# Altium PCB ESP32_DevBoard_B.PcbDoc
Units mm, origin at the board's own origin, x right, y up, seen from the top; angles counter-clockwise.
Board outline 118.7 x 85.5 mm, 2 copper layers (Top Layer, Bottom Layer); 33 components, 34 nets, 115 pads, 67 vias.
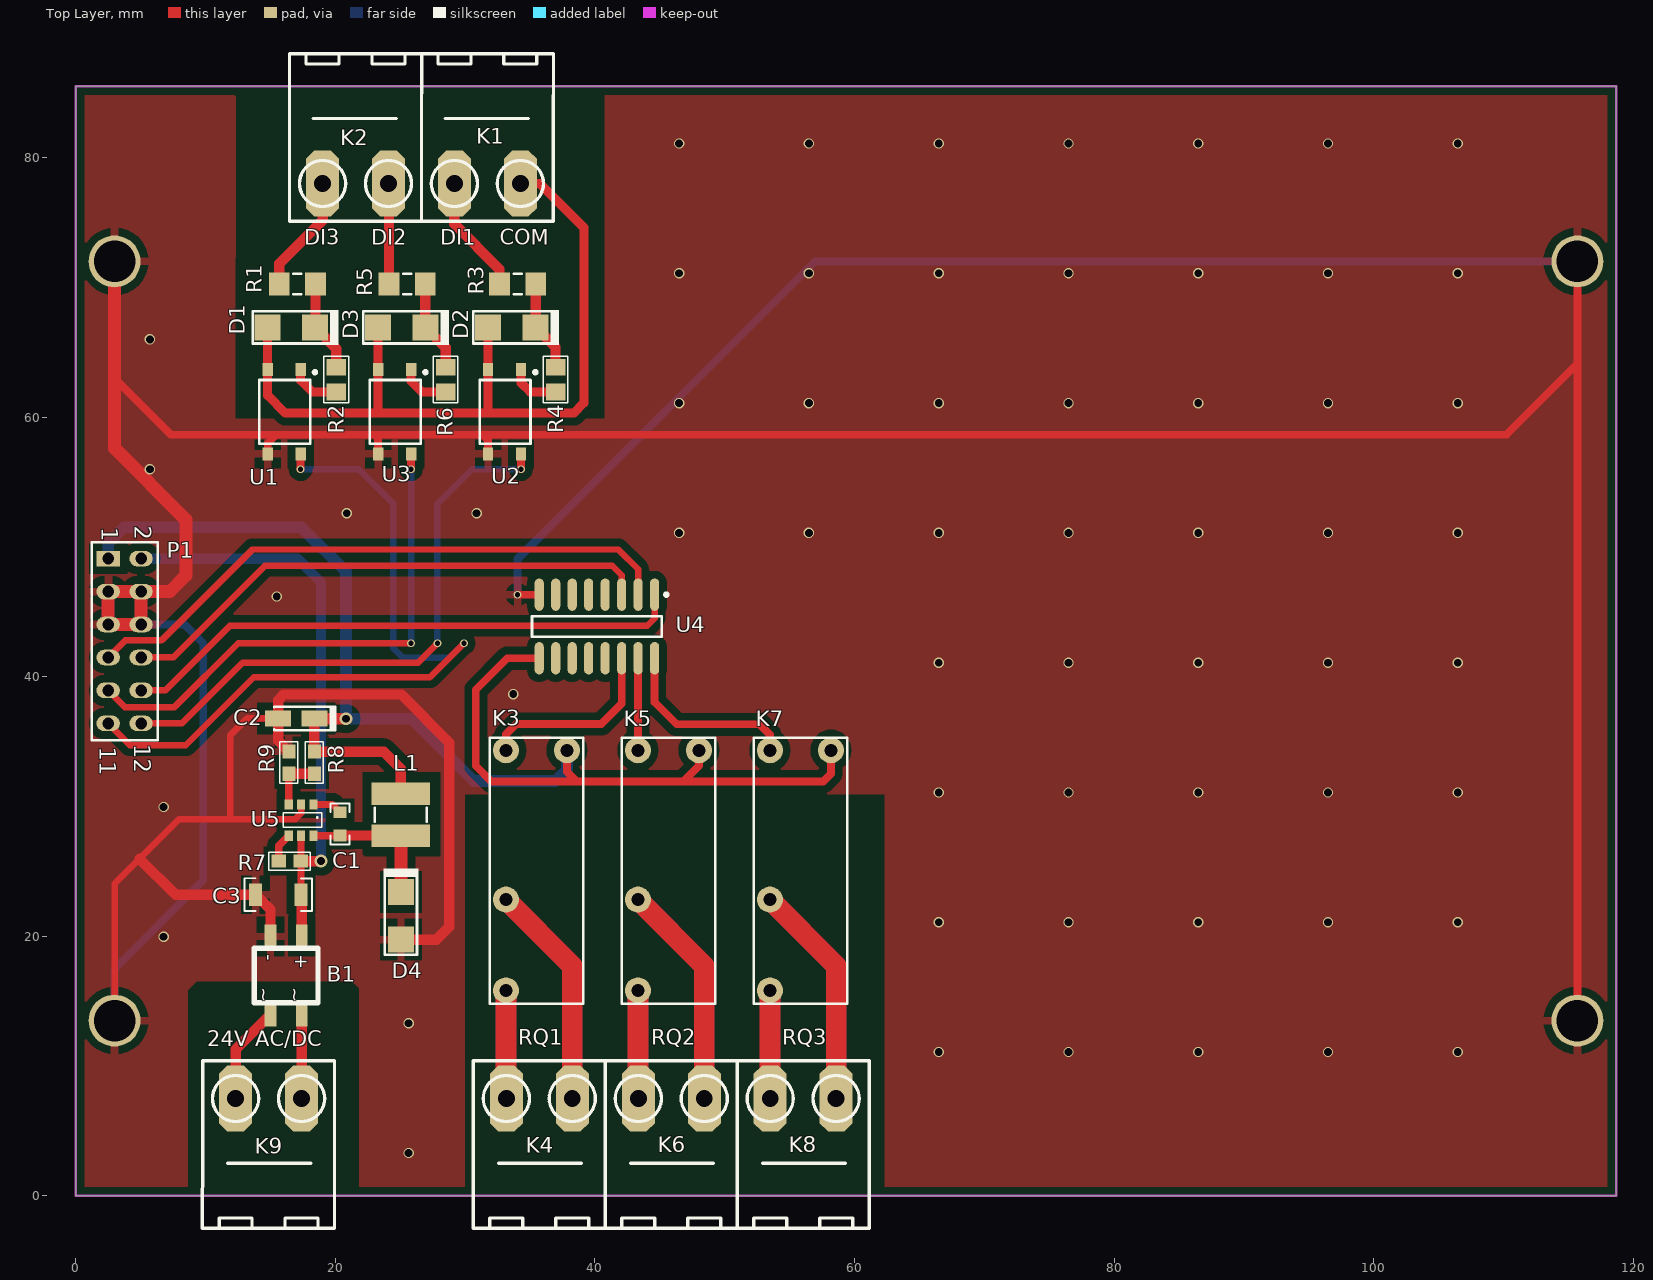
[diagram p0: Top Layer view]
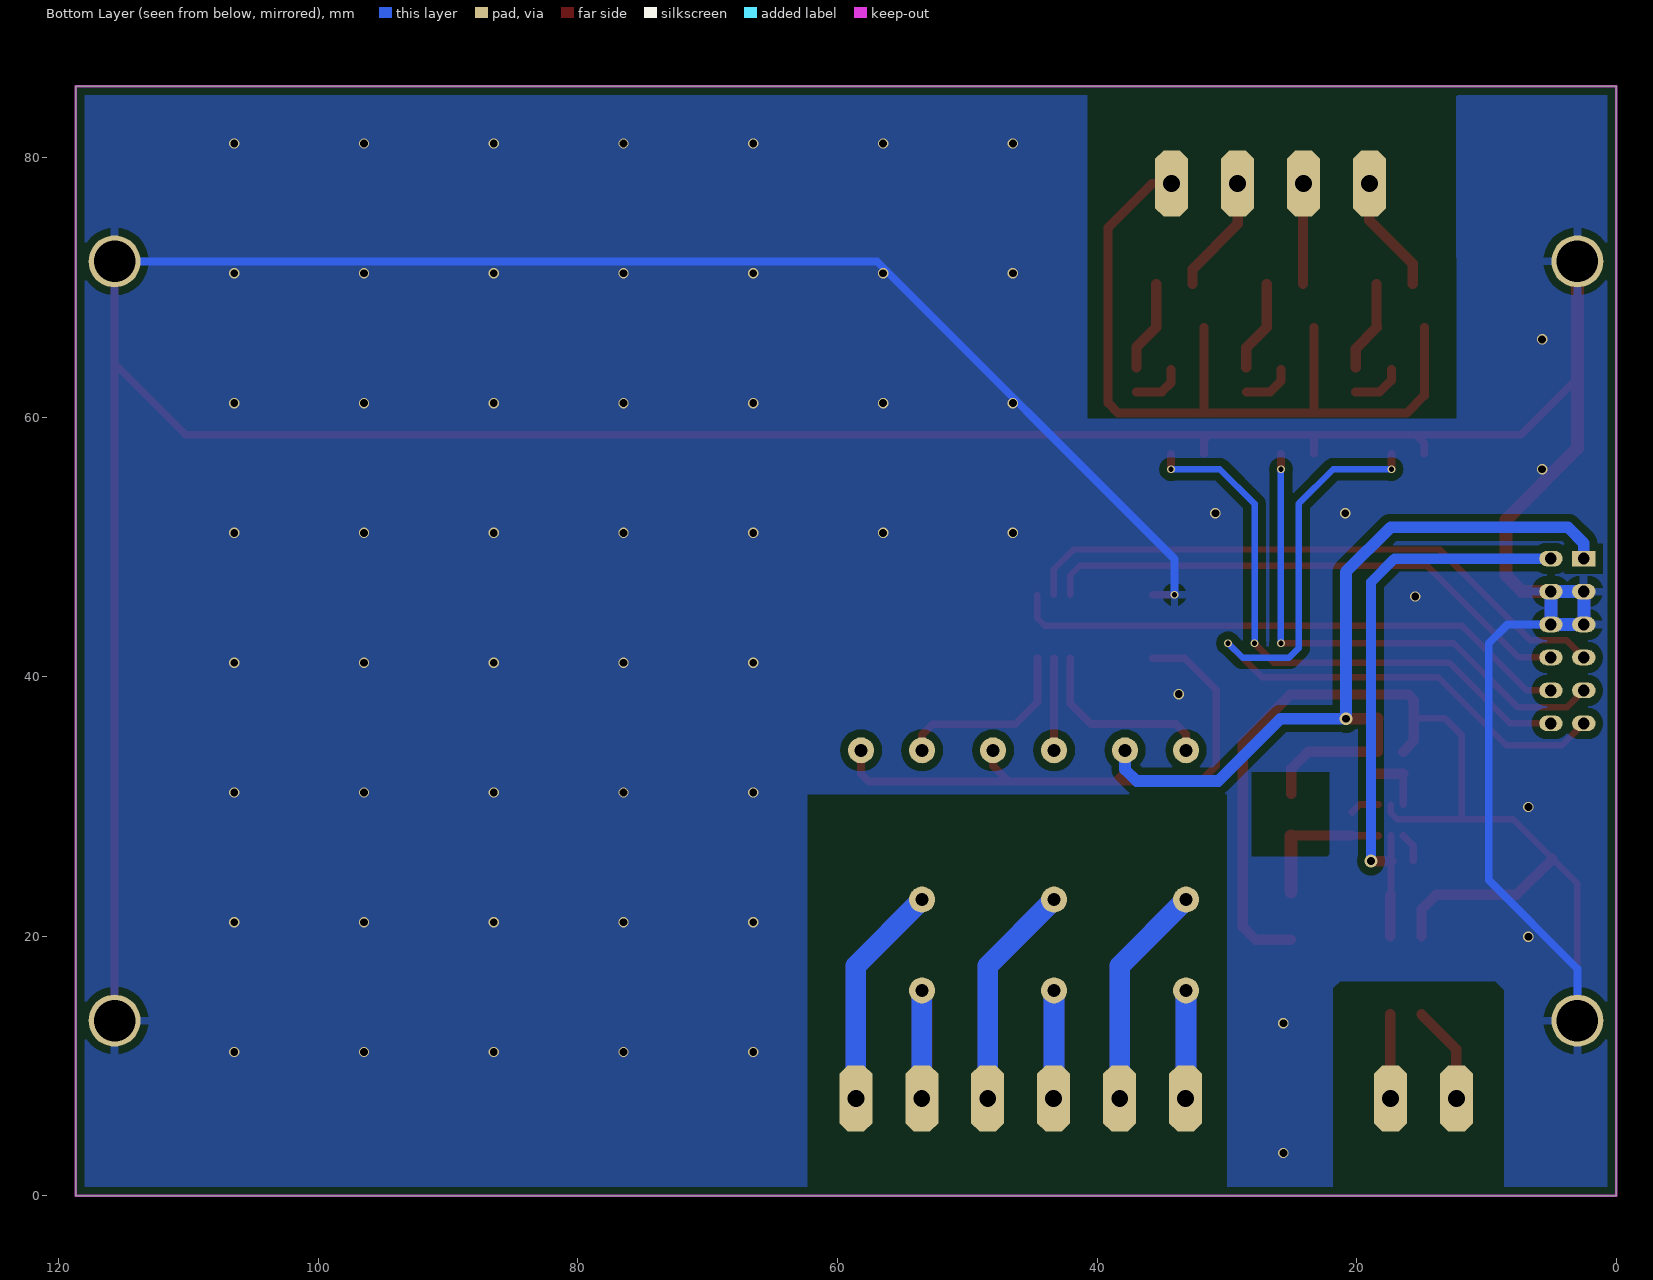
[diagram p1: Bottom Layer view, seen from below]
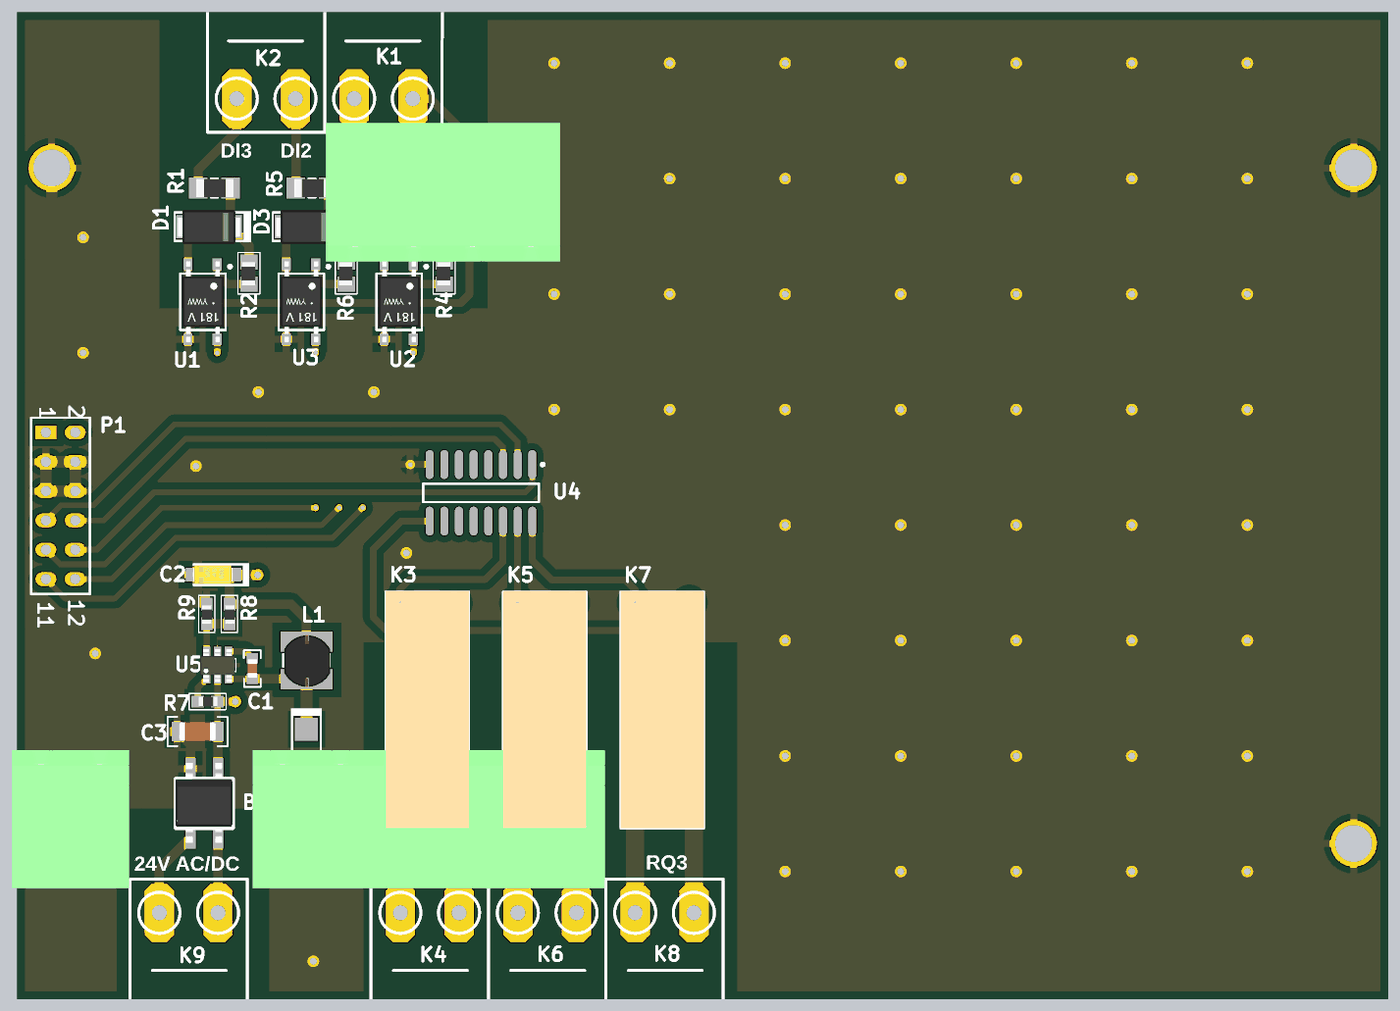
[diagram p2: 3D render of the assembled board from above, using the file's embedded part models]

## Layer stack, top to bottom
Top Layer: signal copper 0.0356
Dielectric: dielectric 0.32, FR-4, Dk 4.8
Bottom Layer: signal copper 0.0356

## Board outline
0,0 0,85.5 118.7,85.5 118.7,0

## Design rules (kind name [scope] priority, off if disabled: settings)
Clearance [All] p1: gap=0.6
PlaneConnect [All] p1: planeconnectstyle=Relief reliefexpansion=0.508 reliefentries=4 reliefconductorwidth=0.6 reliefairgap=0.254
PolygonConnect [All] p1: connectstyle=Relief reliefconductorwidth=0.6 reliefentries=4 polygonreliefangle="90 Angle"
RoutingVias [All] p1: holewidth=0.711 width=1.27 viastyle="Through Hole" minholewidth=0.711 minwidth=1.27 maxholewidth=0.711 maxwidth=1.27
SilkscreenOverComponentPads [All] p1: minsilkscreentomaskgap=0.254
SolderMaskExpansion [All] p1: expansion=0.102
TestPointUsage [All] p1: valid=0 allowmultiple=FALSE
Testpoint [All] p1: side=15 testpointundercomponent=TRUE minsize=1.016 maxsize=2.54 preferedsize=1.524 minholesize=0 maxholesize=1.016 preferedholesize=0.813 testpointgrid=0.025 style=1023 order=0123456789
Width [All] p1: maxlimit=1.6 minlimit=0.254 preferedwidth=0.6
22 further rules are at their usual default settings.

## Classes and differential pairs
component class Connector: P1
component class Input_Digital: D1 D2 D3 K1 K2 R1 R2 R3 R4 R5 R6 U1 U2 U3
component class Output_Digital: K3 K4 K5 K6 K7 K8 U4
component class Power: B1 C1 C2 C3 D4 K9 L1 R7 R8 R9 U5

## Components (designator, comment, footprint, x,y, rotation, side; value= is the part's Value field where it differs from the comment)
B1 "B10S" B10S 16.21,16.98 r90 top
C1 "100nF/35V" CAP0603W 20.37,28.66 r270 top
C2 "10uF/16V" "CAP A" 17,36.78 r180 top
C3 "4.7uF/35V" CAP1206W 15.62,23.2 r180 top
D1 "1SMA4737A" DO214AC 16.62,66.91 r0 top
D2 "1SMA4737A" DO214AC 33.6,66.91 r0 top
D3 "1SMA4737A" DO214AC 25.12,66.91 r0 top
D4 "SS16" DO214AC 25.06,21.57 r90 top
K1 "2EDGR-5.08-02P" CON_DG129_02P 31.72,78 r180 top
K2 "2EDGR-5.08-02P" CON_DG129_02P 21.56,78 r180 top
K3 "ALDP105W" RELAY_ALDP124W 35.5,25.08 r270 top
K4 "2EDGR-5.08-02P" CON_DG129_02P 35.72,7.5 r0 top
K5 "ALDP105W" RELAY_ALDP124W 45.67,25.08 r270 top
K6 "2EDGR-5.08-02P" CON_DG129_02P 45.89,7.5 r0 top
K7 "ALDP105W" RELAY_ALDP124W 55.84,25.08 r270 top
K8 "2EDGR-5.08-02P" CON_DG129_02P 56.05,7.5 r0 top
K9 "2EDGR-5.08-02P" CON_DG129_02P 14.86,7.5 r0 top
L1 "22uH" "INDUCTOR C43" 25.05,29.36 r180 top
P1 "Header 6X2" HDR2X6 2.5,49.1 r270 top locked
R1 "1K" RES3216[1206] 17.08,70.26 r180 top
R2 "1K" RES2012[0805] 20.08,62.89 r90 top
R3 "1K" RES3216[1206] 34.05,70.26 r180 top
R4 "1K" RES2012[0805] 36.97,62.89 r90 top
R5 "1K" RES3216[1206] 25.54,70.26 r180 top
R6 "1K" RES2012[0805] 28.5,62.89 r90 top
R7 "4K7" RES1608[0603] 16.49,25.79 r0 top
R8 "52K3" RES1608[0603] 18.39,33.38 r270 top
R9 "10K" RES1608[0603] 16.42,33.38 r270 top
U1 "LVT_357T" SMD-4 16.06,60.42 r180 top
U2 "LVT_357T" SMD-4 33.04,60.42 r180 top
U3 "LVT_357T" SMD-4 24.57,60.42 r180 top
U4 "ULN2004D" SO16_M 40.16,43.87 r270 top
U5 "AOZ1282CI" SOT23-6 17.36,28.95 r180 top

## Footprints (in the part's own frame and the unit in brackets; to place one, negate y for a bottom-side part, rotate by r counter-clockwise, add the part's x,y. Pads: shape width x height; smd on the part's side, far side on the other; paste and mask are expansions set on the pad)
B10S [mm] "BRIDGE RECTIFIER B10S 0.5A 1000V 1PH 7*2.3mm SMD T/R PANJIT"
  rect 1.84x0.9 smd: 1(-3,1.2) 2(-3,-1.2) 3(3,-1.2) 4(3,1.2)
  silkscreen extent -2.11,-2.45 2.09,2.45, body extent -3.4,-2.45 3.5,2.5, height 2.9
CAP0603W [mm] "capacitor 0603 wave soldering"
  rect 0.9x1 smd: 1(-0.9,0) 2(0.9,0)
  silkscreen extent -1.58,-0.73 1.59,0.72, body extent -0.8,-0.4 0.8,0.4, height 0.3
CAP1206W [mm] "capacitor 1206 wave soldering"
  rect 1x1.7 smd: 1(-1.75,0) 2(1.75,0)
  silkscreen extent -2.6,-1.27 2.6,1.27, body extent -1.6,-0.8 1.6,0.8, height 1
"CAP A" [mm] "Capacitor, SM Tantalum; Body 3.2 x 1.6 mm (LxW typ)"
  rect 2x1.2 smd: 1(-1.4,0) 2(1.4,0)
  silkscreen extent -3,-0.9 1.7,0.9, body extent -1.68,-0.8 1.78,0.8, height 1.64
CON_DG129_02P [mm] "Klemens 2'li"
  oct 2.54x5.08 hole 1.3: 1(2.54,0) 2(-2.54,0)
  silkscreen extent -5.1,-10 5.08,2.9, body extent -5.15,-9.9 5.01,2.1, height 8.6
DO214AC [mm] "DO214-AC DIODE"
  rect 2x2 smd: 1(-1.83,0) 2(1.83,0)
  silkscreen extent -2.98,-1.34 3.64,1.34, body extent -2.8,-1.5 2.8,1.45, height 2.9
HDR2X6 [mm]
  rect 1.2x1.8 hole 0.9: 1(0,0)
  oval 1.2x1.8 hole 0.9: 2(0,2.54) 3(2.54,0) 4(2.54,2.54) 5(5.08,0) 6(5.08,2.54) 7(7.62,0) 8(7.62,2.54) 9(10.16,0) 10(10.16,2.54) 11(12.7,0) 12(12.7,2.54)
  silkscreen extent -1.27,-1.27 14,3.81
"INDUCTOR C43" [mm]
  rect 4.5x1.75 smd: 1(0,1.625) 2(0,-1.625)
  silkscreen extent -2,-0.55 2,0.55, body extent -2.07,-2.19 1.93,2.31, height 3.22
RELAY_ALDP124W [mm] "RELAY PANASONIC ALDP124W"
  round 2 hole 1: 1(9.25,-2.35) 2(2.25,-2.35) 3(-9.25,2.35) 4(-9.25,-2.35)
  silkscreen extent -10.22,-3.59 10.28,3.61, body extent -10.25,-3.6 10.25,3.61, height 15.29
RES1608[0603] [mm] "Chip Capacitor; Body 1.6 x 0.8 mm (LxW typ)"
  rect 1.1x1 smd: 1(-0.85,0) 2(0.85,0)
  silkscreen extent -1.6,-0.7 1.6,0.7, body extent -0.75,-0.41 0.85,0.44, height 0.6
RES2012[0805] [mm] "Chip Resistor; Body 2.0 x 1.3 mm (LxW typ)"
  rect 1.3x1.5 smd: 1(-0.95,0) 2(0.95,0)
  silkscreen extent -1.8,-0.95 1.8,0.95, body extent -1.05,-0.55 0.95,0.65, height 0.65
RES3216[1206] [mm] "Chip Resistor; Body 3.2 x 1.6 mm (LxW typ)"
  rect 1.6x1.8 smd: 1(-1.4,0) 2(1.4,0)
  silkscreen extent -0.3,-0.8 0.3,0.8, body extent -1.65,-0.8 1.55,0.8, height 0.7
SMD-4 [mm] "NPN Phototransistor"
  rect 0.8x1 smd: 1(-1.27,-3.25) 2(1.27,-3.25) 3(1.27,3.25) 4(-1.27,3.25)
  silkscreen extent -2.5,-3.16 1.92,2.46, body extent -1.84,-3.5 1.76,3.5, height 2
SO16_M [mm] "16-Pin Small Outline Integrated Circuit 1.27 mm Pitch, IPC Low Density"
  oval 2.5x0.7 smd: 1(-2.45,4.445) 2(-2.45,3.175) 3(-2.45,1.905) 4(-2.45,0.635) 5(-2.45,-0.635) 6(-2.45,-1.905) 7(-2.45,-3.175) 8(-2.45,-4.445) 9(2.45,-4.445) 10(2.45,-3.175) 11(2.45,-1.905) 12(2.45,-0.635) 13(2.45,0.635) 14(2.45,1.905) 15(2.45,3.175) 16(2.45,4.445)
  silkscreen extent -2.57,-5 0.8,5.47, body extent -2.15,-5 1.85,5, height 1.75
SOT23-6 [mm] "IC-1282 REG BUCK ADJ 1.2A SOT23-6"
  rect 0.63x0.8 smd: 1(-0.95,-1.2) 1(-0.95,-1.2) 2(0,-1.2) 2(0,-1.2) 3(0.95,-1.2) 3(0.95,-1.2) 4(0.95,1.2) 5(0,1.2) 6(-0.95,1.2)
  silkscreen extent -1.6,-0.55 1.35,0.55, body extent -1.5,-1.37 1.5,1.47, height 1.2

## Part data
B1: library part "BRIDGE RECTIFIER", "DIODE B10S MIC SMD"
C1: library part CAP1, "CAPACITOR 0603 Case"
C2: library part CAP2, "CAPACITOR Polarized Capacitor"
C3: library part CAP1, "CAPACITOR 1206Case"
D1 D2 D3: library part DIODE, "DIODE Zener Diode 7.5V 1W DO214AC"
D4: library part DIODE, "DIODE SCHOTTKY SS16 1A 60V DO214AC SMA"
K1 K2 K4 K6 K8 K9: library part KLEMENS_2P, "CONNECTOR 5.08mm 2PIN 90DEG"
K3 K5 K7: library part RELAY_ALDP124W, "RELAY PANASONIC ALDP105W 5A"
L1: library part INDUCTOR, "INDUCTOR 22uH SDR43-220M-LF SMD 4.5X4X3.2MM"
P1: "CONNECTOR Header, 6-Pin, Dual row"
R1 R3 R5: library part RES, "RESISTOR 1206 Case %1"
R2 R4 R6: library part RES, "RESISTOR 0805 Case %1"
R7 R8 R9: library part RES, "RESISTOR 0603 Case %1"
U1 U2 U3: "OPTOCOUPLER Transistor Output Optocouplers Optocoupler Phototrans"
U4: "IC Seven Darlington Array Integrated suppression diodes for inductive  loads"
U5: "REGULATOR IC-1282 REG BUCK ADJ 1.2A SOT23-6"

## Free pads (board coordinates)
  round 4 hole 3.2: 4(3,13.5) 4(3,72) 4(115.7,13.5) 4(115.7,72)

## Via types
v1: diameter 0.8, hole 0.6, Top Layer to Bottom Layer, 58 vias
v2: diameter 0.6, hole 0.4, Top Layer to Bottom Layer, 7 vias
v3: diameter 1, hole 0.6, Top Layer to Bottom Layer, 2 vias

## Nets (pads, with @x,y where several pads share a name; then routed paths per layer and width w, separated by ;. In a path a pad name is that pad's centre, name@x,y a point inside that pad or via, vN(x,y) a via of type N, cw(c..) or ccw(c..) an arc to the next point about the centre after c; other vN are vias at no path point)
5V: C2.1 K3.3 K5.3 K7.3 L1.2 P1.1 R8.1 U4.9 | length 115
  Top Layer w0.6: U4.9 33.25,41.42 30.83,39 30.83,33.13 32.03,31.93 38.59,31.93 ; K3.3 37.85,32.67 38.59,31.93 ; K5.3 48.02,33.13 46.82,31.93 ; K7.3 58.19,32.52 57.6,31.93 46.82,31.93 ; 38.59,31.93 39.24,31.93 46.82,31.93
  Top Layer w0.8: C2.1 18.39,36.77 R8.1 23.72,34.23 25.05,32.9 L1.2
  Top Layer w0.9: C2.1 18.42,36.76 v3(20.83,36.76)
  Bottom Layer w0.9: P1.1 2.5,50.29 3.72,51.51 17.39,51.51 20.83,48.07 v3(20.83,36.76) 25.87,36.76 30.67,31.96 36.96,31.96 37.85,32.85 K3.3
24V: B1.3 C3.1 P1.2 R7.2 U5.5 | length 45.5
  Top Layer w0.55: U5.5 17.36,25.79 17.36,23.21 C3.1
  Top Layer w0.8: R7.2 17.36,25.79 v3(18.9,25.79) ; C3.1 17.41,23.16 B1.3
  Bottom Layer w0.8: P1.2 17.09,49.1 18.9,47.29 v3(18.9,25.79)
GND: B1.4 C2.2 C3.2 D4.1 P1.3 P1.4 P1.5 P1.6 pad.4 R9.1 U1.3 U2.3 U3.3 U4.8 U5.2 | length 453.7
  Top Layer w0.5: pad.4@3,13.5 3,24.06 4.915,25.975 7.95,29.01 11.89,29.01 ; C2.2 13.2,36.78 11.89,35.47 11.89,29.01 ; U5.2@17.36,30.15 17.36,29.47 16.9,29.01 11.89,29.01
  Top Layer w0.6: 3,62.98 7.34,58.64 15.45,58.64 ; U1.3 14.79,57.98 15.45,58.64 ; U3.3 23.3,58.56 23.38,58.64 ; U2.3 31.77,58.23 31.36,58.64 ; v2(34.04,46.32) U4.8 ; pad.4@115.7,13.5 115.7,64.11 ; pad.4@115.7,72 115.7,64.11 ; 15.45,58.64 23.38,58.64 ; 23.38,58.64 31.36,58.64 ; 31.36,58.64 110.23,58.64 115.7,64.11
  Top Layer w0.8: 4.915,25.975 7.69,23.2 C3.2 15.01,22.06 B1.4 ; R9.1 15.6,35.05 C2.2 15.6,38.19 16.04,38.63 25.07,38.63 28.79,34.91 28.79,20.74 27.79,19.74 D4.1
  Top Layer w1: pad.4@3,72 3,62.98 3,57.59 8.49,52.1 8.49,47.79 7.26,46.56 P1.4 ; P1.4 P1.6 P1.5 P1.3 P1.4
  Bottom Layer w0.6: pad.4@3,13.5 3,17.5 9.83,24.33 9.83,42.57 8.38,44.02 P1.6 ; v2(34.04,46.32) 34.04,49.07 56.97,72 pad.4@115.7,72
  Bottom Layer w1: P1.5 P1.6 P1.4 P1.3 P1.5
  other v1: 5.72,55.99 46.49,61.08 56.49,71.08
GND_ISO: D1.1 D2.1 D3.1 K1.2 U1.2 U2.2 U3.2 | length 63.6
  Top Layer w0.7: D1.1 U1.2 14.79,61.67 16.15,60.31 23.18,60.31 ; D3.1 23.3,66.9 U3.2 23.3,60.43 23.18,60.31 ; D2.1 U2.2 31.77,60.47 31.61,60.31 ; K1.2 35.77,78 39.16,74.61 39.16,61.09 38.38,60.31 31.61,60.31 ; 23.18,60.31 31.61,60.31
NetB1_1: B1.1 K9.2 | length 7.6
  Top Layer w0.8: K9.2 12.32,11.29 B1.1
NetB1_2: B1.2 K9.1 | length 6.5
  Top Layer w0.8: K9.1 17.41,7.51 B1.2
NetC1_1: C1.1 U5.1 | length 2.3
  Top Layer w0.55: U5.1@18.31,30.15 19.78,30.15 C1.1
NetC1_2: C1.2 D4.2 L1.1 U5.6 | length 11.1
  Top Layer w0.55: U5.6 20.36,27.75 C1.2
  Top Layer w0.8: C1.2 25.025,27.76 L1.1
  Top Layer w1: L1.1 25.06,27.725 D4.2
NetD1_2: D1.2 R1.1 R2.2 | length 7.1
  Top Layer w0.8: R1.1 18.48,66.94 D1.2 20.08,65.28 R2.2
NetD2_2: D2.2 R3.1 R4.2 | length 7.1
  Top Layer w0.8: R3.1 35.45,66.93 D2.2 36.97,65.37 R4.2
NetD3_2: D3.2 R5.1 R6.2 | length 7.1
  Top Layer w0.8: R5.1 26.94,66.92 D3.2 28.5,65.36 R6.2
NetK1_1: K1.1 R3.2 | length 9.2
  Top Layer w0.8: K1.1 29.18,74.88 32.65,71.41 R3.2
NetK2_1: K2.1 R1.2 | length 9.1
  Top Layer w0.8: R1.2 15.68,71.83 19.02,75.17 K2.1
NetK2_2: K2.2 R5.2 | length 7.8
  Top Layer w0.8: K2.2 24.14,77.96 R5.2
NetK3_1: K3.1 K4.2 | length 16.7
  Top Layer w1.6: K3.1 33.15,7.53 K4.2
  Bottom Layer w1.6: K3.1 33.15,7.53 K4.2
NetK3_2: K3.2 K4.1 | length 34.9
  Top Layer w1.6: K3.2 38.26,17.72 K4.1
  Bottom Layer w1.6: K3.2 38.26,17.72 K4.1
NetK3_4: K3.4 U4.14 | length 14.6
  Top Layer w0.6: K3.4 33.15,35.56 33.95,36.36 40.495,36.36 42.065,37.93 U4.14
NetK5_1: K5.1 K6.2 | length 16.7
  Top Layer w1.6: K5.1 43.32,7.53 K6.2
  Bottom Layer w1.6: K5.1 43.32,7.53 K6.2
NetK5_2: K5.2 K6.1 | length 34.9
  Top Layer w1.6: K5.2 48.43,17.72 K6.1
  Bottom Layer w1.6: K5.2 48.43,17.72 K6.1
NetK5_4: K5.4 U4.15 | length 7.1
  Top Layer w0.6: K5.4 43.335,34.345 U4.15
NetK7_1: K7.1 K8.2 | length 16.7
  Top Layer w1.6: K7.1 53.49,7.52 K8.2
  Bottom Layer w1.6: K7.1 53.51,15.81 K8.2
NetK7_2: K7.2 K8.1 | length 34.9
  Top Layer w1.6: K7.2 58.59,17.73 K8.1
  Bottom Layer w1.6: K7.2 58.59,17.73 K8.1
NetK7_4: K7.4 U4.16 | length 14.5
  Top Layer w0.6: U4.16 44.605,38.035 46.31,36.33 52.68,36.33 53.49,35.52 K7.4
NetP1_7: P1.7 U4.2 | length 46.9
  Top Layer w0.5: P1.7 3.81,42.79 6.61,42.79 13.62,49.8 41.81,49.8 43.335,48.275 U4.2
NetP1_8: P1.8 U4.3 | length 41.7
  Top Layer w0.5: P1.8 7.52,41.48 14.58,48.54 41.34,48.54 42.065,47.815 U4.3
NetP1_9: P1.9 U3.4 | length 40.5
  Top Layer w0.5: P1.9 3.78,37.66 7.61,37.66 12.53,42.58 v2(25.84,42.58)
  Top Layer w0.6: v2(25.84,55.99) U3.4
  Bottom Layer w0.5: v2(25.84,42.58) v2(25.84,55.99)
NetP1_10: P1.10 U4.1 | length 43.7
  Top Layer w0.5: P1.10 6.89,38.94 11.88,43.93 44.04,43.93 44.605,44.495 U4.1
NetP1_11: P1.11 U1.4 | length 58.1
  Top Layer w0.5: P1.11 4.18,34.72 8.48,34.72 13.72,39.96 27.29,39.96 v2(29.91,42.58)
  Top Layer w0.6: v2(17.33,55.99) U1.4
  Bottom Layer w0.5: v2(17.33,55.99) 21.81,55.99 24.46,53.34 24.46,42.21 25.22,41.45 28.78,41.45 v2(29.91,42.58)
NetP1_12: P1.12 U2.4 | length 44.9
  Top Layer w0.5: P1.12 8.18,36.4 12.86,41.08 26.375,41.08 v2(27.875,42.58)
  Top Layer w0.6: v2(34.31,55.99) U2.4
  Bottom Layer w0.5: v2(27.875,42.58) 27.875,53.315 30.55,55.99 v2(34.31,55.99)
NetR2_1: R2.1 U1.1 | length 4
  Top Layer w0.7: U1.1 17.33,62.84 18.23,61.94 R2.1
NetR4_1: R4.1 U2.1 | length 4
  Top Layer w0.7: U2.1 34.31,62.64 35.01,61.94 R4.1
NetR6_1: R6.1 U3.1 | length 3.9
  Top Layer w0.7: U3.1 25.84,62.77 26.67,61.94 R6.1
NetR7_1: R7.1 U5.4 | length 2.3
  Top Layer w0.55: R7.1 15.64,26.98 U5.4
NetR8_2: R8.2 R9.2 U5.3 | length 4.4
  Top Layer w0.55: U5.3@16.41,30.15 16.41,32.52 R9.2
  Top Layer w0.8: R9.2 R8.2
pads on no net: U4.4 U4.5 U4.6 U4.7 U4.10 U4.11 U4.12 U4.13
copper on no net:
  other v1: 25.65,3.3 66.49,11.08 76.49,11.08 86.49,11.08 96.49,11.08 106.49,11.08 25.65,13.3 6.77,19.96 66.49,21.08 76.49,21.08 86.49,21.08 96.49,21.08 106.49,21.08 6.77,29.96 66.49,31.08 76.49,31.08 86.49,31.08 96.49,31.08 106.49,31.08 33.71,38.66 66.49,41.08 76.49,41.08 86.49,41.08 96.49,41.08 106.49,41.08 15.49,46.18 46.49,51.08 56.49,51.08 66.49,51.08 76.49,51.08 86.49,51.08 96.49,51.08 106.49,51.08 20.89,52.59 30.89,52.59 56.49,61.08 66.49,61.08 76.49,61.08 86.49,61.08 96.49,61.08 106.49,61.08 5.72,65.99 46.49,71.08 66.49,71.08 76.49,71.08 86.49,71.08 96.49,71.08 106.49,71.08 46.49,81.08 56.49,81.08 66.49,81.08 76.49,81.08 86.49,81.08 96.49,81.08 106.49,81.08

## Polygon pours and split planes (outlines as drawn)
GND on Top Layer "TOP_GND" (solid): 0,0 118.7,0 118.7,85.5 0,85.5
GND on Bottom Layer "BOT_GND" (solid): 0,85.5 118.7,85.5 118.7,0 0,0

## Keep-outs
Keep-Out Layer:
  the board outline again, w0.2

## Other copper
Multi-Layer:
  pour cut-out: 8.62,0 8.62,15.84 9.32,16.54 21.28,16.54 21.83,15.99 21.83,0.04 21.87,0
  pour cut-out: 29.97,0 29.97,30.94 62.34,30.94 62.34,0.01 62.33,0
  pour cut-out: 22.11,32.62 28.1,32.62 28.1,26.17 22.26,26.17 22.11,26.32
  pour cut-out: 12.31,59.86 40.75,59.86 40.75,85.47 40.78,85.5 12.44,85.5 12.32,85.38

## Silkscreen, mask and mechanical layers (free items; w line width, h text height)
Top Overlay:
  text "DI3" at 17.6,72.9 h2
  text "DI2" at 22.77,72.9 h2
  text "DI1" at 28.1,72.9 h2
  text "COM" at 32.69,72.883 h2
  text "RQ1" at 34.1,11.259 h2
  text "RQ2" at 44.34,11.259 h2
  text "RQ3" at 54.43,11.259 h2
  text "24V AC/DC" at 10.14,11.15 h2

## Text inside footprints (layer, text, board x,y; h text height)
B1: Top Overlay "~" at 16.42,16.06 h1 r270; Top Overlay "~" at 14.04,16.08 h1 r270; Top Overlay "-" at 14.46,18.61 h1 r270; Top Overlay "+" at 16.91,18.62 h1 r270
P1: Top Overlay "2" at 4.532,51.64 h1.27 r270; Top Overlay "1" at 2,51.5 h1.27 r270; Top Overlay "11" at 1.85,34.6 h1.27 r270; Top Overlay "12" at 4.5,34.8 h1.27 r270